# EAGLE board JDM2_w_MOSFET_2 (EAGLE 7.7.0)

Size 160 x 100 mm. Coordinates in mm from the lower left corner, seen from the top.
Outline: 0,0 160,0 160,100 0,100 0,0
Copper layers (1*16): Top 0.035mm / dielectric 1.5mm / Bottom 0.035mm
Design rules "default": minimum track width 10mil, minimum drill 24mil, track to track 8mil, track to pad 8mil, pad to pad 8mil, via to via 8mil, smd to smd 8mil, copper to edge 40mil, drill to drill 8mil, minimum pad ring 10mil, minimum via ring 8mil, stop-mask expansion 4mil, vias tented up to drill 0mil, thermal gap 10mil
Net classes: 0 default: width 0.559 mm; 1 power: width 0.559 mm

## Footprints (pad centres in the part's own frame; a part is rotated, then mirrored left to right if it is on the bottom)
E2,5-6 = drill 0.813 pad 1.6: + -1.27,0 | drill 0.813 pad 1.6 octagon: - 1.27,0
DO35-7 = drill 0.7 pad 1.422: A 3.81,0; C -3.81,0
DO35Z7 = drill 0.7 pad 1.422: A 3.81,0; C -3.81,0
DO35-5 = drill 0.6 pad 1.422: A 2.54,0; C -2.54,0
DIL28-3 = drill 0.813 long: 1 -16.51,-3.81; 2 -13.97,-3.81; 3 -11.43,-3.81; 4 -8.89,-3.81; 5 -6.35,-3.81; 6 -3.81,-3.81; 7 -1.27,-3.81; 8 1.27,-3.81; 9 3.81,-3.81; 10 6.35,-3.81; 11 8.89,-3.81; 12 11.43,-3.81; 13 13.97,-3.81; 14 16.51,-3.81; 15 16.51,3.81; 16 13.97,3.81; 17 11.43,3.81; 18 8.89,3.81; 19 6.35,3.81; 20 3.81,3.81; 21 1.27,3.81; 22 -1.27,3.81; 23 -3.81,3.81; 24 -6.35,3.81; 25 -8.89,3.81; 26 -11.43,3.81; 27 -13.97,3.81; 28 -16.51,3.81
JP1 = drill 0.914 long: 1 0,-1.27; 2 0,1.27
1X05 = drill 1.016 long: 1 -5.08,0; 2 -2.54,0; 3 0,0; 4 2.54,0; 5 5.08,0
LED5MM = drill 0.813 pad 1.93 octagon: A -1.27,0; K 1.27,0
0204/7 = drill 0.813 octagon: 1 -3.81,0; 2 3.81,0
0204/5 = drill 0.813 octagon: 1 -2.54,0; 2 2.54,0
MA03-1 = drill 1.016 long: 1 -2.54,0; 2 0,0; 3 2.54,0
TO92-CBE = drill 0.7 pad 1.422: B 0,0; C -2.54,0; E 2.54,0
TO92 = drill 0.813 octagon: 1 -2.54,0; 2 0,0; 3 2.54,0

## Placement (x,y rotation side)
C1  100uF 40v  [E2,5-6]  -25.4,25.4 0 top  (outside the outline)
C2  22uF 16v  [E2,5-6]  -39.37,25.4 0 top  (outside the outline)
D1  1N4148  [DO35-7]  -27.94,39.37 0 top  (outside the outline)
D2  8.2v  [DO35Z7]  -17.78,33.02 0 top  (outside the outline)
D3  5.1v  [DO35Z7]  -48.26,25.4 0 top  (outside the outline)
D4  1N4148  [DO35-5]  -43.18,33.02 0 top  (outside the outline)
D5  1N4148  [DO35-5]  -17.78,39.37 0 top  (outside the outline)
D6  1N4148  [DO35-5]  -30.48,33.02 0 top  (outside the outline)
D7  2N4148  [DO35-5]  -49.53,-3.81 0 top  (outside the outline)
IC1  [DIL28-3]  -31.75,6.35 0 top  (outside the outline)
JP1  \!28p  [JP1]  -36.83,39.37 0 top  (outside the outline)
JP2  [1X05]  -46.99,39.37 0 top  (outside the outline)
JP3  [1X05]  -20.32,45.72 0 top  (outside the outline)
LED1  Power  [LED5MM]  -36.83,16.51 0 top  (outside the outline)
LED2  Vpp  [LED5MM]  -48.26,16.51 0 top  (outside the outline)
R1  10k  [0204/7]  -46.99,44.45 0 top  (outside the outline)
R2  1.5k  [0204/7]  -17.78,50.8 0 top  (outside the outline)
R4  1K  [0204/7]  -48.26,-22.86 0 top  (outside the outline)
R5  15K  [0204/5]  -49.53,-16.51 0 top  (outside the outline)
R6  4.7k  [0204/7]  -38.1,50.8 0 top  (outside the outline)
R7  1.2k  [0204/7]  -27.94,50.8 0 top  (outside the outline)
SV3  [MA03-1]  -48.26,-11.43 0 top  (outside the outline)
T1  BC547  [TO92-CBE]  -24.13,16.51 0 top  (outside the outline)
T2  BC547  [TO92-CBE]  -16.51,16.51 0 top  (outside the outline)
T3  2N7000  [TO92]  -38.1,45.72 0 top  (outside the outline)

## Library data of the parts
C1 C2 R1 R2 R4-R7 = rcl
D1-D7 T1-T3 = JDM2
IC1 = ic-package
JP1 = jumper
JP2 JP3 = pinhead
LED1 LED2 = 1dmf
SV3 = con-lstb; OC_FARNELL: unknown; OC_NEWARK: unknown

## Nets
2N3904: C1.+ D2.C T1.C
CTS: JP2.5 R2.2 T2.C
DATA: IC1.28 JP3.5 T2.E
DTR: JP2.2 R2.1
GND: C1.- C2.- D1.A D3.A D5.A IC1.8 IC1.19 JP3.1 LED1.K LED2.K R5.1
MCLR: IC1.1 JP3.3 SV3.2
N$1: R1.1 T2.B
N$2: LED1.A R7.1
N$3: LED2.A R6.1
N$7: IC1.5 IC1.14 JP1.2
N$9: R4.1 SV3.3
N$10: D7.A R4.2 R5.2
RTS: D4.A D5.C IC1.27 JP2.4 JP3.4
SGND: C2.+ D2.A D3.C D4.C JP2.3 R7.2 T3.1
TXD: D1.C D6.C JP2.1 T1.B
VDD: IC1.20 IC1.25 JP3.2 R1.2 T3.3
VPP: D6.A D7.C JP1.1 R6.2 SV3.1 T1.E T3.2

## Tracks (layer width: path | path; a pad name or v marks a point on that pad's centre or on a via)
2N3904  (2 unrouted)
CTS  (2 unrouted)
DATA  (2 unrouted)
DTR  (1 unrouted)
GND  (10 unrouted)
MCLR  (2 unrouted)
N$1  (1 unrouted)
N$2  (1 unrouted)
N$3  (1 unrouted)
N$7  (2 unrouted)
N$9  (1 unrouted)
N$10  (2 unrouted)
RTS  (4 unrouted)
SGND  (6 unrouted)
TXD  (3 unrouted)
VDD  (4 unrouted)
VPP  (6 unrouted)